# Altium PCB PCB2.PcbDoc
Units mm, origin at the board's own origin, x right, y up, seen from the top; angles counter-clockwise.
Board outline 101.6 x 101.6 mm, 2 copper layers (Top Layer, Bottom Layer); 15 components, 18 nets, 62 pads, 0 vias.
Unrouted connection lines stored in the file: 1.
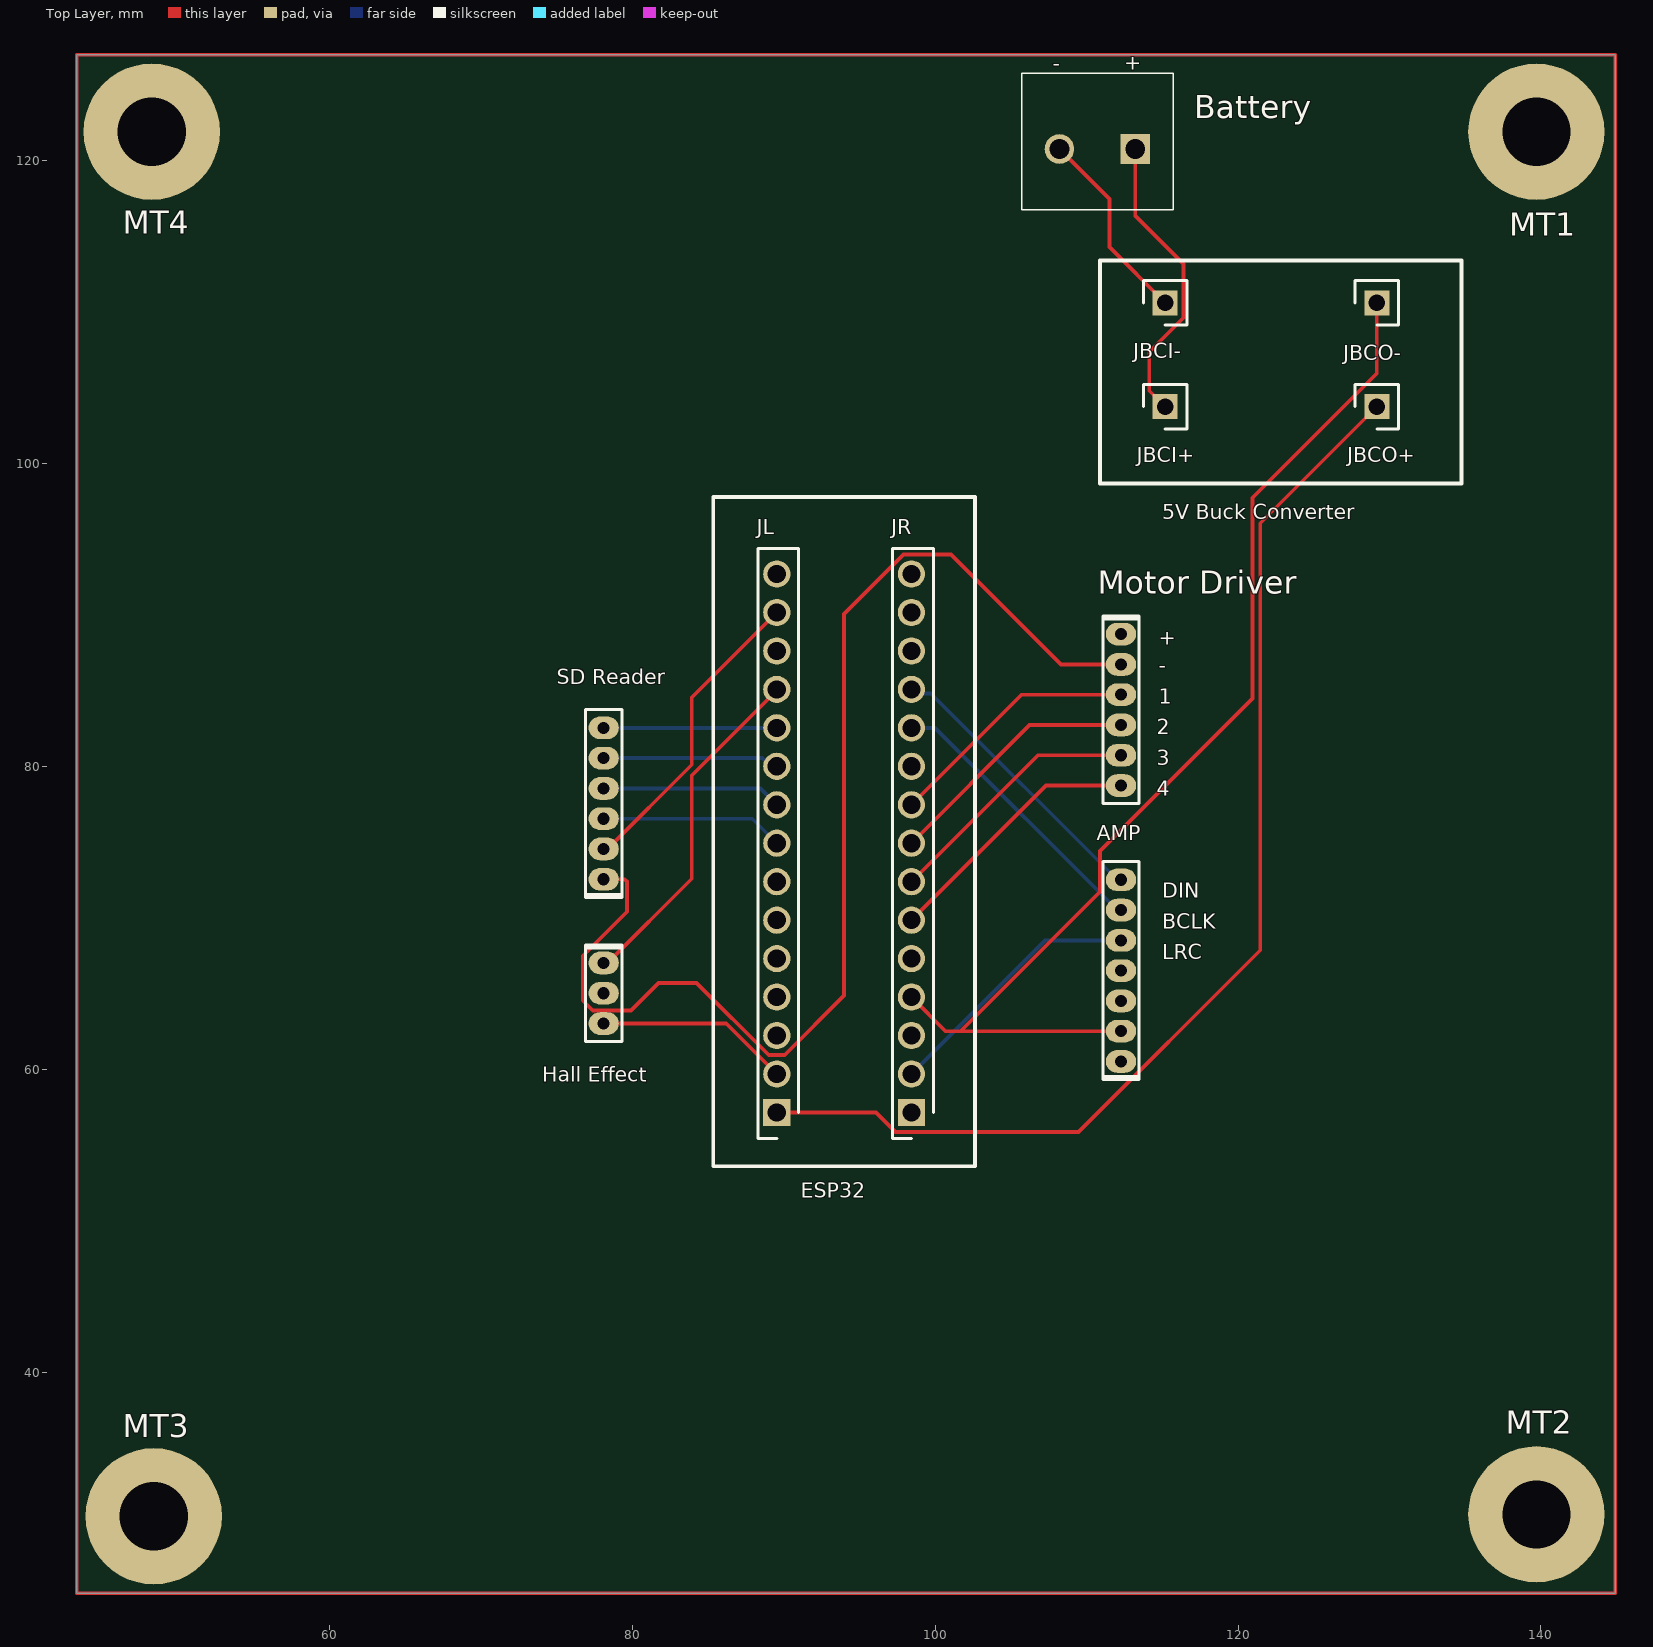
[diagram p0: Top Layer view]
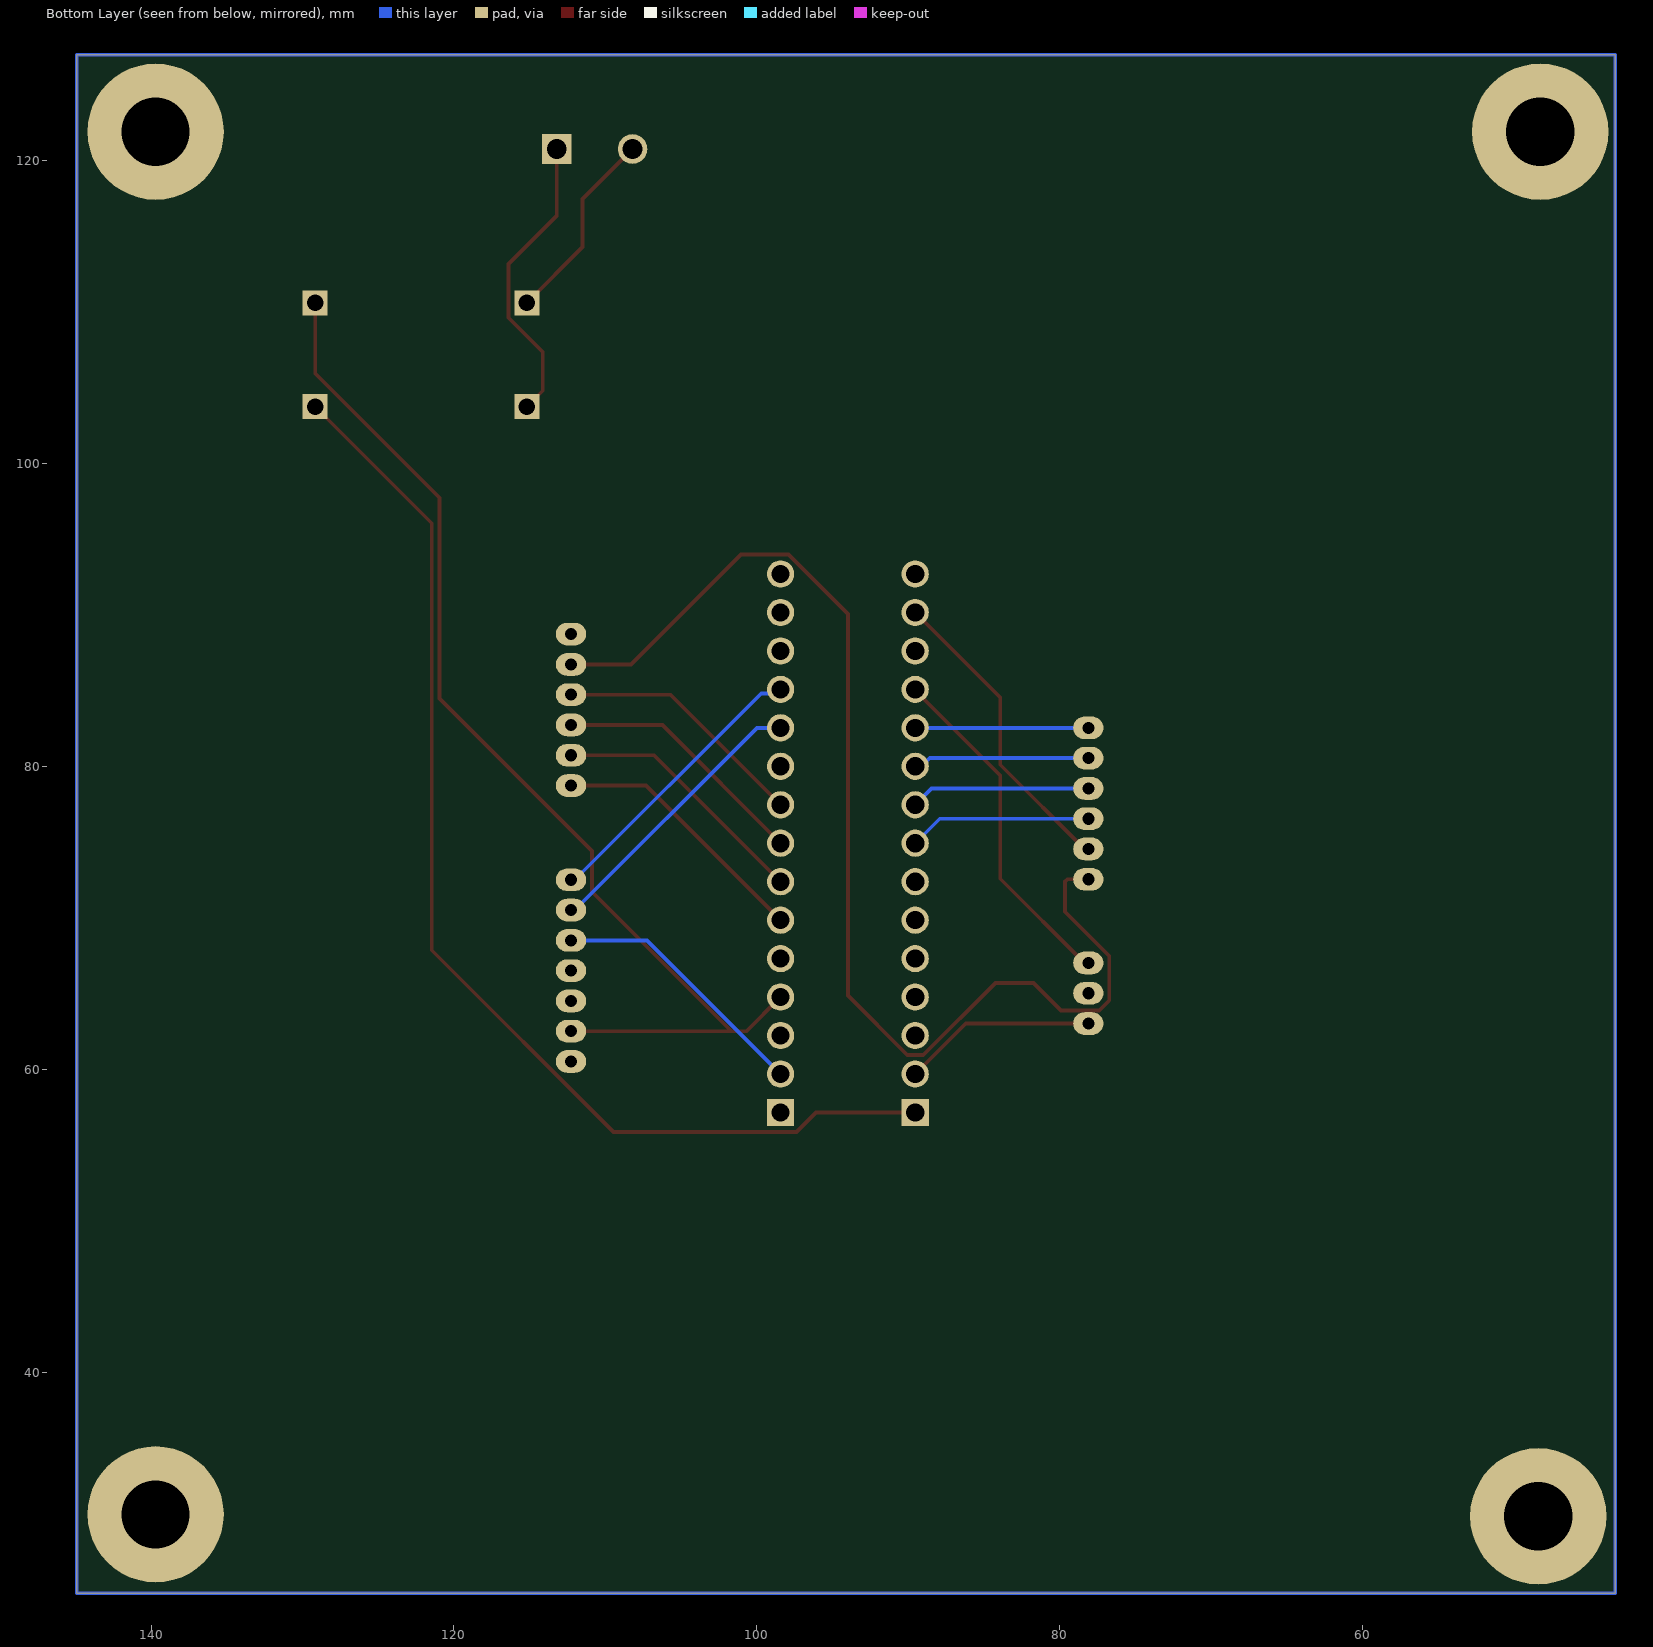
[diagram p1: Bottom Layer view, seen from below]
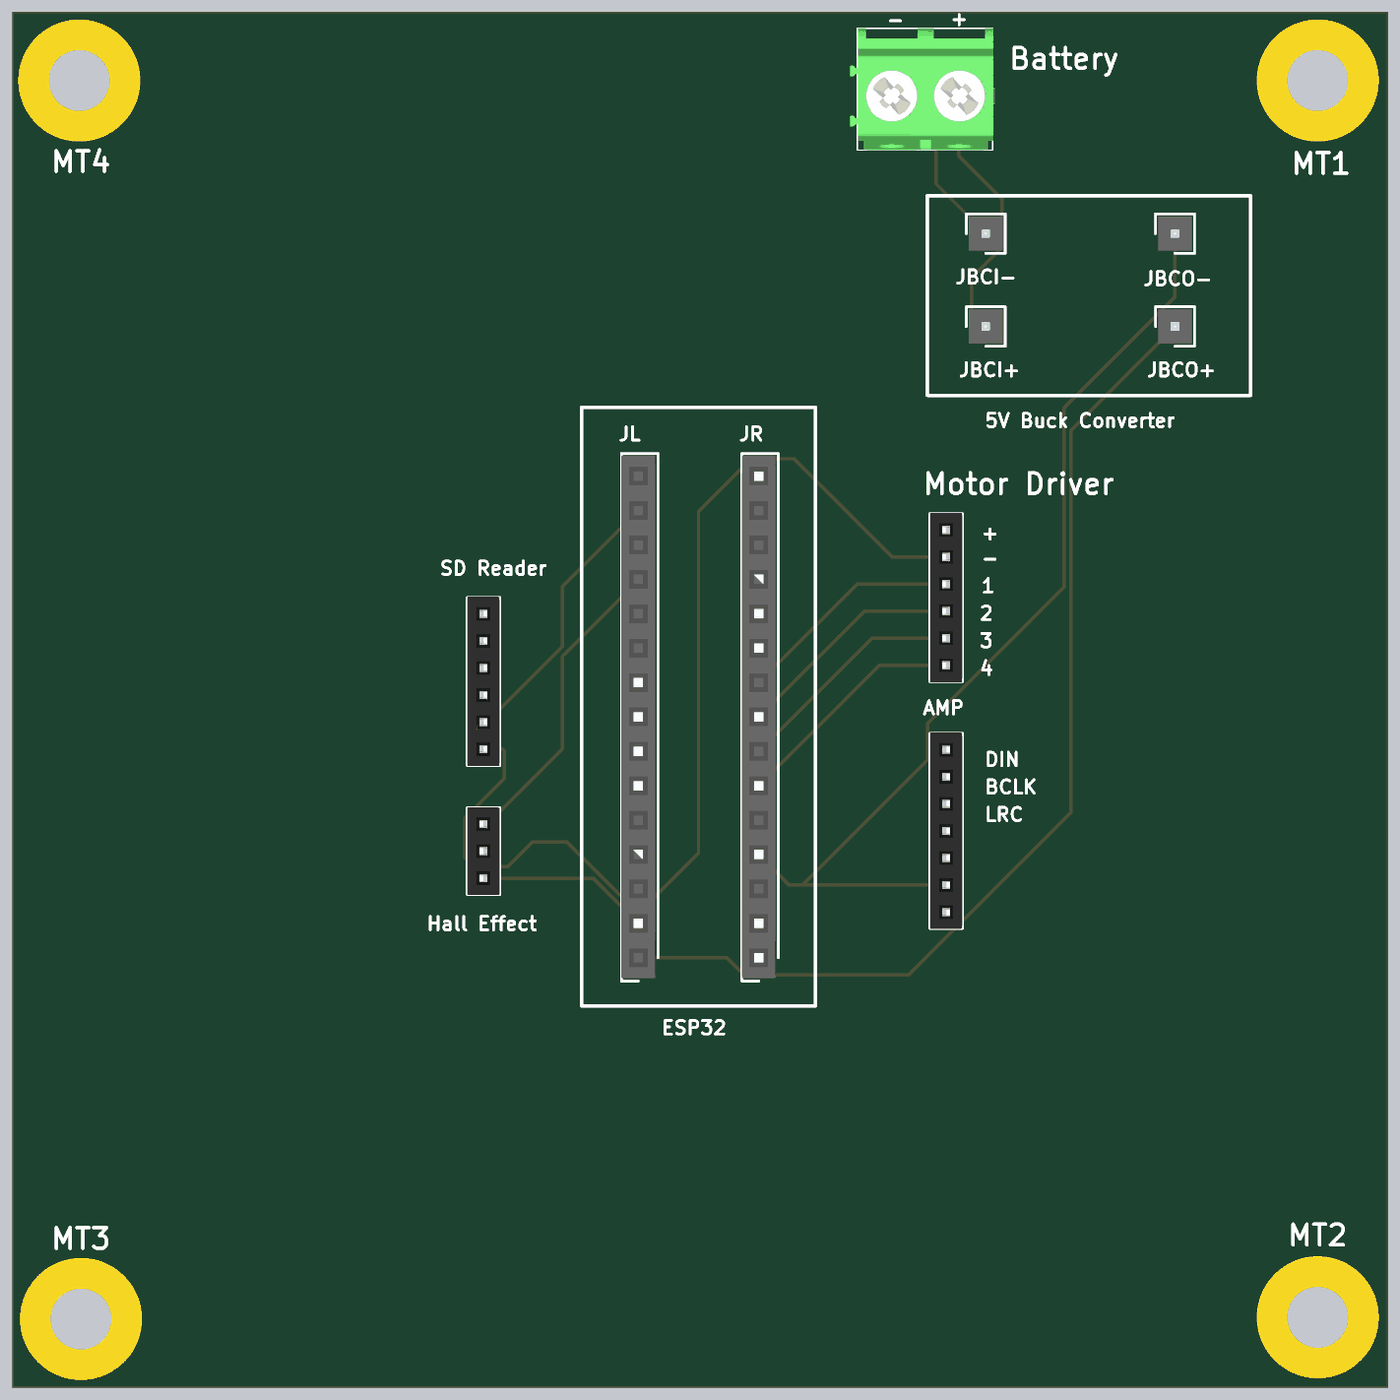
[diagram p2: 3D render of the assembled board from above, using the file's embedded part models]

## Layer stack, top to bottom
Top Solder: solder mask 0.0102, Solder Resist, Dk 3.5
Top Layer: signal copper 0.0356
Dielectric 1: dielectric 0.32, FR-4, Dk 4.8
Bottom Layer: signal copper 0.0356
Bottom Solder: solder mask 0.0102, Solder Resist, Dk 3.5

## Board outline
43.307,25.4 43.307,127 144.907,127 144.907,25.4

## Design rules (kind name [scope] priority, off if disabled: settings)
Clearance [All] p1: gap=0.254 ignorepadtopadclearanceinfootprint=FALSE
PolygonConnect [All] p1: connectstyle=Relief reliefconductorwidth=0.254 reliefentries=4 polygonreliefangle="90 Angle" airgapwidth=0.254
RoutingVias [All] p1: holewidth=0.711 width=1.27 viastyle="Through Hole" minholewidth=0.711 minwidth=1.27 maxholewidth=0.711 maxwidth=1.27
SolderMaskExpansion [All] p1: expansion=0 istentingtop=FALSE
Width [All] p1: maxlimit=0.254 minlimit=0.254 preferedwidth=0.254
30 further rules are at their usual default settings.

## Components (designator, comment, footprint, x,y, rotation, side; value= is the part's Value field where it differs from the comment)
AMP "NPPN071BFCN-RC" "SULLINS NPPN071BFCN" 112.268,66.517 r90 top
Battery "1935161" 1935161 113.204,120.777 r180 top
"Hall Effect" "NPPN031BFCN-RC" "SULLINS NPPN031BFCN" 78.105,65.024 r270 top
JBCI+ "PH1-01-UA" HDRV1W64P0X254_1X1_254X250X888P 115.189,103.759 r90 top
JBCI- "PH1-01-UA" HDRV1W64P0X254_1X1_254X250X888P 115.189,110.617 r90 top
JBCO+ "PH1-01-UA" HDRV1W64P0X254_1X1_254X250X888P 129.159,103.759 r90 top
JBCO- "PH1-01-UA" HDRV1W64P0X254_1X1_254X250X888P 129.159,110.617 r90 top
JL "SSK02-FPH-254-A15" RHDR15W69P0X254_1X15_3860X250X870P 89.535,57.15 r90 top
JR "SSK02-FPH-254-A15" RHDR15W69P0X254_1X15_3860X250X870P 98.425,57.15 r90 top
"Motor Driver" "NPPN061BFCN-RC" "SULLINS NPPN061BFCN" 112.268,83.74 r270 top
MT1 "PTH-M4D9X9" PTH-M4D9X9 139.7,121.92 r0 top
MT2 "PTH-M4D9X9" PTH-M4D9X9 139.7,30.607 r0 top
MT3 "PTH-M4D9X9" PTH-M4D9X9 48.387,30.48 r0 top
MT4 "PTH-M4D9X9" PTH-M4D9X9 48.26,121.92 r0 top
"SD Reader" "NPPN061BFCN-RC" "SULLINS NPPN061BFCN" 78.105,77.55 r90 top

## Footprints (in the part's own frame and the unit in brackets; to place one, negate y for a bottom-side part, rotate by r counter-clockwise, add the part's x,y. Pads: shape width x height; smd on the part's side, far side on the other; paste and mask are expansions set on the pad)
1935161 [mm]
  rect 1.95x1.95 hole 1.3: 1(0,0)
  round 1.95 hole 1.3: 2(5,0)
  silkscreen extent -2.5,-5 7.5,4, body extent -2.64,-5 8.03,4, height 11.3
HDRV1W64P0X254_1X1_254X250X888P [mm]
  rect 1.65x1.65 hole 1.1: 1(0,0)
  silkscreen extent -1.46,-1.44 1.46,1.44, body extent -1.27,-1.25 1.27,1.25, height 8.88
PTH-M4D9X9 [mm] "M4 PTH (4.5mm hole), 9mm pad"
  round 9 hole 4.5: 1(0,0)
RHDR15W69P0X254_1X15_3860X250X870P [mm]
  rect 1.8x1.8 hole 1.2: 1(0,0)
  round 1.8 hole 1.2: 2(2.54,0) 3(5.08,0) 4(7.62,0) 5(10.16,0) 6(12.7,0) 7(15.24,0) 8(17.78,0) 9(20.32,0) 10(22.86,0) 11(25.4,0) 12(27.94,0) 13(30.48,0) 14(33.02,0) 15(35.56,0)
  silkscreen extent -1.72,-1.45 37.23,1.25, body extent -1.52,-1.25 37.08,1.25, height 8.7
"SULLINS NPPN031BFCN" [mm]
  oval 1.5x2 hole 0.8: 1(-2,0) 2(0,0) 3(2,0)
  silkscreen extent -3.2,-1.2 3.2,1.2, body extent -3.25,-1.2 3.25,1.2, height 4.41
"SULLINS NPPN061BFCN" [mm]
  oval 1.5x2 hole 0.8: 1(-5,0) 2(-3,0) 3(-1,0) 4(1,0) 5(3,0) 6(5,0)
  silkscreen extent -6.2,-1.2 6.2,1.2, body extent -6.25,-1.2 6.25,1.2, height 4.41
"SULLINS NPPN071BFCN" [mm]
  oval 1.5x2 hole 0.8: 1(-6,0) 2(-4,0) 3(-2,0) 4(0,0) 5(2,0) 6(4,0) 7(6,0)
  silkscreen extent -7.2,-1.2 7.2,1.2, body extent -7.25,-1.2 7.25,1.2, height 4.41

## Part data
AMP: "CONN HDR 7POS 0.079 GOLD PCB", Current Rating (Amps)=2A, Insulation Color=Black, Manufacturer="Sullins Connector Solutions", Material Flammability Rating="UL94 V-0", Operating Temperature="-40°C ~ 105°C", Supplier Part Number 1=S5751-07-ND, ComponentLink1Description=Datasheet, ComponentLink1URL=https://drawings-pdf.s3.amazonaws.com/10483.pdf, ComponentLink2Description="DigiKey Link", ComponentLink2URL=https://www.digikey.com/en/products/detail/sullins-connector-solutions/NPPN071BFCN-RC/804809, Connector Type=Header, Contact Finish - Mating=Gold, Contact Finish - Post=Gold, Contact Finish Thickness - Mating=Flash, Contact Length - Post="0.094\" (2.40mm)", Contact Type="Female Socket", Fastening Type=Push-Pull, Insulation Height="0.173\" (4.40mm)", LastUpdated="6/21/2022 2:43:39 PM", Lifecycle Status=Active, Minimum Order=1, Mounting Type="Through Hole", Number of Positions=7, Number of Positions Loaded=All, Number of Rows=1, Packaging=Tube, Part Number=NPPN071BFCN-RC, Part Status=Active, Pitch - Mating="0.079\" (2.00mm)", Price=0.42, Series=-, Style="Board to Board", Supplier 1=DigiKey, Termination=Solder
Battery: "Connector", Manufacturer_Name="Phoenix Contact", Mouser Part Number=651-1935161, Arrow Part Number=1935161, Arrow Price/Stock=https://www.arrow.com/en/products/1935161/phoenix-contact?utm_currency=USD&region=nac, Datasheet Link=https://www.phoenixcontact.com/en-us/products/printed-circuit-board-terminal-pt-15-2-50-h-1935161?type=pdf, Height=11.55mm, Manufacturer_Part_Number=1935161, Mouser Price/Stock=https://www.mouser.co.uk/ProductDetail/Phoenix-Contact/1935161?qs=W3wJikR1%252BS6eKzfFl8Rbew%3D%3D
"Hall Effect": "CONN HDR 3POS 0.079 GOLD PCB", Current Rating (Amps)=2A, Insulation Color=Black, Manufacturer="Sullins Connector Solutions", Material Flammability Rating="UL94 V-0", Operating Temperature="-40°C ~ 105°C", Supplier Part Number 1=S5751-03-ND, ComponentLink1Description=Datasheet, ComponentLink1URL=https://drawings-pdf.s3.amazonaws.com/10483.pdf, ComponentLink2Description="DigiKey Link", ComponentLink2URL=https://www.digikey.com/en/products/detail/sullins-connector-solutions/NPPN031BFCN-RC/804805, Connector Type=Header, Contact Finish - Mating=Gold, Contact Finish - Post=Gold, Contact Finish Thickness - Mating=Flash, Contact Length - Post="0.094\" (2.40mm)", Contact Type="Female Socket", Fastening Type=Push-Pull, Insulation Height="0.173\" (4.40mm)", LastUpdated="6/21/2022 2:42:20 PM", Lifecycle Status=Active, Minimum Order=1, Mounting Type="Through Hole", Number of Positions=3, Number of Positions Loaded=All, Number of Rows=1, Packaging=Tube, Part Number=NPPN031BFCN-RC, Part Status=Active, Pitch - Mating="0.079\" (2.00mm)", Price=0.25, Series=-, Style="Board to Board", Supplier 1=DigiKey, Termination=Solder
JBCI+ JBCI- JBCO+ JBCO-: "Connector", Manufacturer_Name="Adam Tech", Mouser Part Number=737-PH1-01-UA, Arrow Part Number=PH1-01-UA, Arrow Price/Stock=https://www.arrow.com/en/products/ph1-01-ua/adam-tech?utm_currency=USD&region=nac, Datasheet Link=https://app.adam-tech.com/products/download/data_sheet/201605/ph1-xx-ua-data-sheet.pdf, Height=8.881mm, Manufacturer_Part_Number=PH1-01-UA, Mouser Price/Stock=https://www.mouser.co.uk/ProductDetail/Adam-Tech/PH1-01-UA?qs=HoCaDK9Nz5d5oFPj3mhtaw%3D%3D
JL JR: "Connector", Manufacturer_Name="Same Sky", Datasheet Link=https://www.sameskydevices.com/product/resource/ssk02-fph-254.pdf, Height=8.7mm, Manufacturer_Part_Number=SSK02-FPH-254-A15
"Motor Driver" "SD Reader": "CONN HDR 6POS 0.079 GOLD PCB", Current Rating (Amps)=2A, Insulation Color=Black, Manufacturer="Sullins Connector Solutions", Material Flammability Rating="UL94 V-0", Operating Temperature="-40°C ~ 105°C", Supplier Part Number 1=S5751-06-ND, ComponentLink1Description=Datasheet, ComponentLink1URL=https://drawings-pdf.s3.amazonaws.com/10483.pdf, ComponentLink2Description="DigiKey Link", ComponentLink2URL=https://www.digikey.com/en/products/detail/sullins-connector-solutions/NPPN061BFCN-RC/804808, Connector Type=Header, Contact Finish - Mating=Gold, Contact Finish - Post=Gold, Contact Finish Thickness - Mating=Flash, Contact Length - Post="0.094\" (2.40mm)", Contact Type="Female Socket", Fastening Type=Push-Pull, Insulation Height="0.173\" (4.40mm)", LastUpdated="6/21/2022 2:43:22 PM", Lifecycle Status=Active, Minimum Order=1, Mounting Type="Through Hole", Number of Positions=6, Number of Positions Loaded=All, Number of Rows=1, Packaging=Tube, Part Number=NPPN061BFCN-RC, Part Status=Active, Pitch - Mating="0.079\" (2.00mm)", Price=0.40, Series=-, Style="Board to Board", Supplier 1=DigiKey, Termination=Solder
MT1 MT2 MT3 MT4: library part CMP-00028-00010-5, "M4 PTH (4.5mm hole, ISO 273), 9mm pad", Pins=1

## Nets (pads, with @x,y where several pads share a name; then routed paths per layer and width w, separated by ;. In a path a pad name is that pad's centre, name@x,y a point inside that pad or via, vN(x,y) a via of type N, cw(c..) or ccw(c..) an arc to the next point about the centre after c; other vN are vias at no path point)
NetAMP_2: AMP.2 JBCO-.1 JR.4 | length 74.3
  Top Layer w0.254: JR.4 100.678,62.517 101.677,62.517 ; AMP.2 101.677,62.517 ; JBCO-.1 129.159,105.948 120.958,97.747 120.958,84.493 110.887,74.422 110.887,71.727 101.677,62.517
NetAMP_5: AMP.5 JR.2 | length 17.5
  Bottom Layer w0.254: JR.2 107.252,68.517 AMP.5
NetAMP_6: AMP.6 JR.11 | length 18.8
  Bottom Layer w0.254: JR.11 99.985,82.55 112.018,70.517 AMP.6
NetAMP_7: AMP.7 JR.12 | length 19.1
  Bottom Layer w0.254: JR.12 98.686,84.829 99.706,84.829 112.018,72.517 AMP.7
NetBattery_1: Battery.1 JBCI+.1 | length 19.7
  Top Layer w0.254: Battery.1 113.204,116.377 116.395,113.186 116.395,109.634 114.132,107.371 114.132,104.816 JBCI+.1
NetBattery_2: Battery.2 JBCI-.1 | length 13.1
  Top Layer w0.254: Battery.2 111.51,117.471 111.51,114.296 JBCI-.1
"NetHall Effect_1": "Hall Effect.1" JL.12 | length 22.9
  Top Layer w0.254: 78.105,67.024 78.355,67.024 83.916,72.585 83.916,79.393 89.535,85.012 JL.12
"NetHall Effect_2": "Hall Effect.2" "SD Reader.2" JL.14 | length 20.5
  Top Layer w0.254: 78.105,74.55 78.355,74.55 83.916,80.111 83.916,84.551 JL.14
"NetHall Effect_3": "Hall Effect.3" "Motor Driver.2" "SD Reader.1" JL.2 | length 93.5
  Top Layer w0.254: 78.105,63.024 86.201,63.024 JL.2 ; 78.105,72.55 79.486,72.55 79.635,72.401 79.635,70.403 76.724,67.492 76.724,64.556 77.387,63.893 79.908,63.893 81.723,65.708 84.245,65.708 89.004,60.949 90.066,60.949 93.98,64.863 93.98,90.077 97.894,93.991 101.043,93.991 108.294,86.74 112.268,86.74
NetJBCO+_1: JBCO+.1 JL.1 | length 76.5
  Top Layer w0.254: JL.1 96.086,57.15 97.367,55.869 109.469,55.869 121.466,67.865 121.466,96.066 JBCO+.1
NetJL_8: "SD Reader.3" JL.8 | length 12.1
  Bottom Layer w0.254: 78.105,76.55 87.915,76.55 JL.8
NetJL_9: "SD Reader.4" JL.9 | length 11.9
  Bottom Layer w0.254: 78.105,78.55 88.455,78.55 JL.9
NetJL_10: "SD Reader.5" JL.10 | length 11.7
  Bottom Layer w0.254: 78.105,80.55 88.577,80.55 89.117,80.01 JL.10
NetJL_11: "SD Reader.6" JL.11 | length 11.4
  Bottom Layer w0.254: 78.105,82.55 JL.11
NetJR_6: "Motor Driver.6" JR.6 | length 17.5
  Top Layer w0.254: JR.6 107.315,78.74 112.268,78.74
NetJR_7: "Motor Driver.5" JR.7 | length 17.3
  Top Layer w0.254: JR.7 106.775,80.74 112.268,80.74
NetJR_8: "Motor Driver.4" JR.8 | length 17.1
  Top Layer w0.254: JR.8 106.235,82.74 112.268,82.74
NetJR_9: "Motor Driver.3" JR.9 | length 16.9
  Top Layer w0.254: JR.9 105.695,84.74 112.268,84.74
pads on no net: "Motor Driver.1" AMP.1 AMP.3 AMP.4 JL.3 JL.4 JL.5 JL.6 JL.7 JL.13 JL.15 JR.1 JR.3 JR.5 JR.10 JR.13 JR.14 JR.15 MT1.1 MT2.1 MT3.1 MT4.1

## Other copper
Multi-Layer:
  the board outline again, w0.254

## Silkscreen, mask and mechanical layers (free items; w line width, h text height)
Top Overlay:
  lines w0.254: 85.344,53.594 102.616,53.594 102.616,97.79 85.344,97.79 85.344,53.594 ; 110.871,98.679 134.747,98.679 134.747,113.411 110.871,113.411 110.871,98.679
  text "+" at 112.468,126.017 h1
  text "-" at 107.769,125.938 h1
  text "5V Buck Converter" at 115.008,96.339 h1
  text "+" at 114.754,88.044 h1
  text "-" at 114.754,86.187 h1
  text "1" at 114.754,84.147 h1
  text "2" at 114.627,82.115 h1
  text "3" at 114.627,80.083 h1
  text "4" at 114.627,78.051 h1
  text "DIN" at 115.008,71.32 h1
  text "BCLK" at 115.008,69.288 h1
  text "LRC" at 115.008,67.256 h1
  text "ESP32" at 91.132,51.508 h1